# EAGLE board AudioMega v101 (EAGLE 6.1)
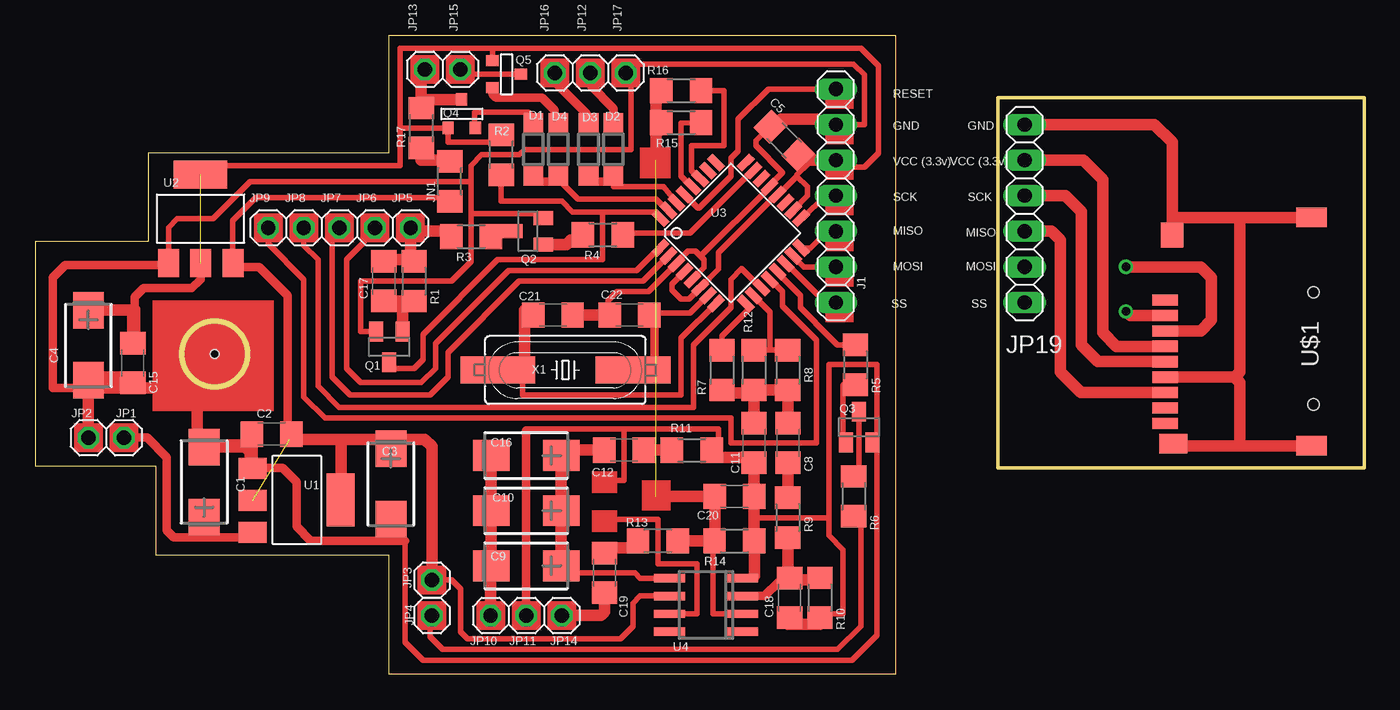
[diagram p0: board, top side]
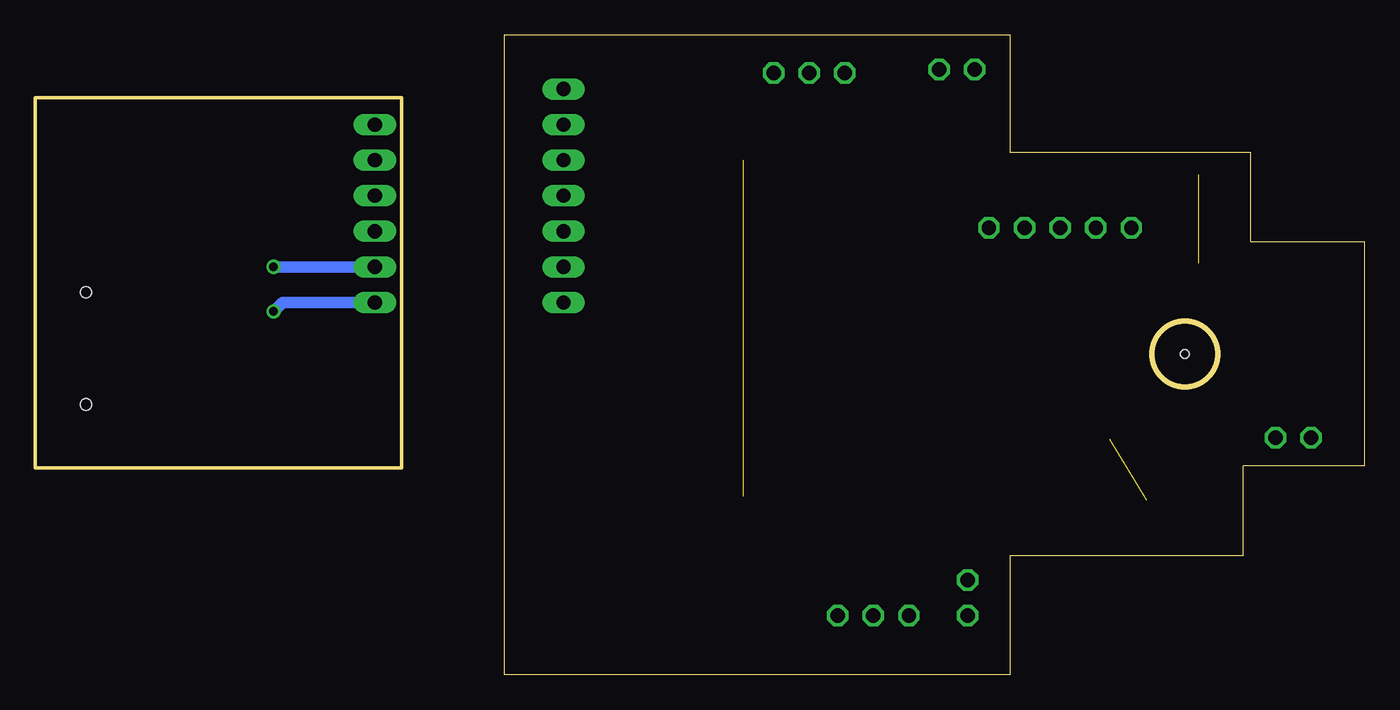
[diagram p1: board, bottom side, seen from below]

Size 94.87 x 45.65 mm. Coordinates in mm from the lower left corner, seen from the top.
Outline: 0,14.89 8.63,14.89 8.63,8.51 25.25,8.51 25.25,0 61.4,0 61.4,45.65 25.25,45.65 25.25,37.27 8.13,37.27 8.13,30.89 0,30.89 0,14.89
Outline: 94.87,14.75 94.87,41.17 68.71,41.17 68.71,14.75 94.87,14.75
Outline: circle at 12.83,22.88 radius 2.33
Copper layers (1*16): Top 0.035mm / dielectric 1.5mm / Bottom 0.035mm
Design rules: minimum track width 10mil, minimum drill 24mil, track to track 8mil, track to pad 8mil, pad to pad 8mil, via to via 8mil, smd to smd 8mil, copper to edge 40mil, drill to drill 8mil, minimum pad ring 10mil, minimum via ring 8mil, stop-mask expansion 4mil, vias tented up to drill 0mil, thermal gap 10mil
Net classes: 0 default: width 0.203 mm; 1 power: width 0.254 mm
Holes 0.6 mm at 12.83,22.88

## Footprints (pad centres in the part's own frame; a part is rotated, then mirrored left to right if it is on the bottom)
CT6032 = smd 2.6 x 2.2: + 2.5,0; - -2.5,0
C1206 = smd 1.6 x 1.8: 1 -1.4,0; 2 1.4,0
SOD123 = smd 1.4 x 1.4: A 1.9,0; C -1.9,0
1X07 = drill 1.016 long: 1 -7.62,0; 2 -5.08,0; 3 -2.54,0; 4 0,0; 5 2.54,0; 6 5.08,0; 7 7.62,0
R1206 = smd 1.6 x 1.803: 1 -1.422,0; 2 1.422,0
1X01 = drill 1.016 octagon: 1 0,0
1X06 = drill 1.016 long: 1 -6.35,0; 2 -3.81,0; 3 -1.27,0; 4 1.27,0; 5 3.81,0; 6 6.35,0
SOT23 = smd 1 x 1.4: 1 -0.95,-1.1; 2 0.95,-1.1; 3 0,1.1
SOT-23 = smd 0.787 x 0.889: 1 0.025,-1.016; 2 -0.94,1.016; 3 0.991,1.016
SOT223 = smd 1.499 x 2.007: 1 -2.261,-3.15; 2 0.025,-3.15; 3 2.311,-3.15 | smd 3.81 x 2.007: 4 0,3.15
TQFP32-08 = smd 1.27 x 0.559: 1 -4.293,2.8; 2 -4.293,2; 3 -4.293,1.2; 4 -4.293,0.4; 5 -4.293,-0.4; 6 -4.293,-1.2; 7 -4.293,-2; 8 -4.293,-2.8; 17 4.293,-2.8; 18 4.293,-2; 19 4.293,-1.2; 20 4.293,-0.4; 21 4.293,0.4; 22 4.293,1.2; 23 4.293,2; 24 4.293,2.8 | smd 0.559 x 1.27: 9 -2.8,-4.293; 10 -2,-4.293; 11 -1.2,-4.293; 12 -0.4,-4.293; 13 0.4,-4.293; 14 1.2,-4.293; 15 2,-4.293; 16 2.8,-4.293; 25 2.8,4.293; 26 2,4.293; 27 1.2,4.293; 28 0.4,4.293; 29 -0.4,4.293; 30 -1.2,4.293; 31 -2,4.293; 32 -2.8,4.293
SO08 = smd 0.6 x 2.2: 1 -1.905,-2.6; 2 -0.635,-2.6; 3 0.635,-2.6; 4 1.905,-2.6; 5 1.905,2.6; 6 0.635,2.6; 7 -0.635,2.6; 8 -1.905,2.6
MICROSD_PP = smd 1.8 x 0.8: 1 0,3.85; 2 0,2.75; 3 0,1.65; 4 0,0.55; 5 0,-0.55; 6 0,-1.65; 7 0,-2.75; 8 0,-3.85; 9 0,-4.95 | smd 1.6 x 1.8: GND@1 0.5,8.5 | smd 2.2 x 1.4: GND@2 10.45,9.75; GND@4 10.45,-6.55 | smd 2 x 1.4: GND@3 0.6,-6.4 | hole 0.8: 10.6,4.4; 10.6,-3.6
HC49UP = smd 5.334 x 1.93: 1 -4.826,0; 2 4.826,0

## Placement (x,y rotation side)
C1  10uF  [CT6032]  12.06,13.73 270 top
C2  100nF  [C1206]  16.89,17.16 180 top
C3  10uF  [CT6032]  25.4,13.61 90 top
C4  10uF  [CT6032]  3.81,23.51 90 top
C5  100nF  [C1206]  53.47,38.12 135 top
C8  100nF  [C1206]  53.72,16.53 90 top
C9  100uF  [CT6032]  35.05,7.76 0 top
C10  100uF  [CT6032]  35.05,11.7 0 top
C11  47nF  [C1206]  51.31,16.53 270 top
C12  47nF  [C1206]  42.04,16.02 180 top
C15  100nF  [C1206]  6.98,22.24 270 top
C16  47uF  [CT6032]  35.05,15.64 0 top
C17  10pF  [C1206]  24.89,28.09 90 top
C18  4n7  [C1206]  53.85,5.48 270 top
C19  100nF  [C1206]  40.64,7.26 90 top
C20  22nF  [C1206]  49.91,12.72 0 top
C21  22pF  [C1206]  36.96,25.67 180 top
C22  22pF  [C1206]  42.42,25.67 0 top
D1  BAT42  [SOD123]  35.56,37.48 90 top
D2  BAT42  [SOD123]  41.27,37.48 270 top
D3  BAT42  [SOD123]  39.5,37.48 270 top
D4  BAT42  [SOD123]  37.34,37.48 90 top
J1  [1X07]  57.15,34.18 90 top
JN1  0  [R1206]  29.59,35.2 270 top
JP1  +Ub  [1X01]  6.35,16.91 0 top
JP2  GND  [1X01]  3.81,16.91 0 top
JP3  BL+ (+5v)  [1X01]  28.32,6.75 0 top
JP4  BL-  [1X01]  28.32,4.21 0 top
JP5  PB7  [1X01]  26.8,31.89 0 top
JP6  D0  [1X01]  24.26,31.89 0 top
JP7  D1  [1X01]  21.72,31.89 0 top
JP8  D2  [1X01]  19.18,31.89 0 top
JP9  D3  [1X01]  16.64,31.89 0 top
JP10  SP+  [1X01]  32.51,4.21 0 top
JP11  SP-  [1X01]  35.05,4.21 0 top
JP12  PD2  [1X01]  39.62,42.94 0 top
JP13  RXD-TTL5v  [1X01]  27.81,43.2 0 top
JP14  BEEPER  [1X01]  37.59,4.21 0 top
JP15  PD3  [1X01]  30.35,43.2 0 top
JP16  TXD-TTL5v  [1X01]  37.08,42.94 0 top
JP17  GND  [1X01]  42.16,42.94 0 top
JP19  [1X06]  70.61,32.91 90 top
Q1  BC846ASMD  [SOT23]  25.27,23.39 180 top
Q2  BC846ASMD  [SOT23]  35.18,31.64 90 top
Q3  BC846ASMD  [SOT23]  58.8,17.67 0 top
Q4  2N7002  [SOT-23]  30.48,40.02 180 top
Q5  2N7002  [SOT-23]  33.66,42.82 90 top
R1  100k  [R1206]  27.05,28.09 90 top
R2  10k  [R1206]  33.27,37.1 270 top
R3  2k2  [R1206]  31.12,31.26 180 top
R4  10k  [R1206]  40.51,31.39 180 top
R5  10k  [R1206]  58.55,22.12 90 top
R6  150  [R1206]  58.42,12.72 90 top
R7  1k  [R1206]  49.02,21.73 90 top
R8  560k  [R1206]  53.72,21.73 90 top
R9  33k  [R1206]  53.72,11.19 90 top
R10  4k7  [R1206]  56.01,5.48 90 top
R11  10  [R1206]  46.86,16.02 180 top
R12  470k  [R1206]  51.31,21.73 90 top
R13  100k  [R1206]  44.45,9.54 0 top
R14  1k  [R1206]  49.91,9.54 180 top
R15  2k2  [R1206]  46.1,39.39 180 top
R16  1k  [R1206]  46.1,41.67 180 top
R17  1k  [R1206]  27.56,39.01 90 top
U1  REG1117-5  [SOT223]  18.67,12.46 270 top
U2  REG1117-3.3  [SOT223]  11.81,32.53 0 top
U3  ATMEGA328-AU  [TQFP32-08]  49.66,31.51 45 top
U4  LM386M  [SO08]  47.88,4.97 90 top
U$1  MICROSD_PP  [MICROSD_PP]  80.65,22.88 0 top
X1  12MHz  [HC49UP]  37.85,21.73 0 top

## Library data of the parts
C1-C5 C8-C12 C15-C22 JN1 R1-R17 = resistor
D1-D4 = diode
J1 JP1-JP17 JP19 = pinhead
Q1-Q3 = transistor-npn
Q4 Q5 = zetex; OC_FARNELL: unknown; OC_NEWARK: unknown
U1 U2 = burr-brown; MPN: REG1117; OC_FARNELL: 1097566; OC_NEWARK: 14P6981
U3 = atmel; MPN: ATMEGA8-16AU; OC_FARNELL: 9171371; OC_NEWARK: 73M8863
U4 = linear
U$1 = DE1594-v2
X1 = crystal; OC_FARNELL: unknown; OC_NEWARK: unknown

## Nets
+3V3: C4.+ C5.1 C15.1 J1.5 Q4.3 Q5.3 R2.1 U2.2 U2.4 U3.4 U3.6 U3.18 U3.20
+5V: C2.1 C3.+ JN1.2 JP3.1 U1.2 U1.4 U2.3 U4.6
B7: C17.2 JP5.1 R1.2 R3.2
CLK: Q1.3 R2.2 U3.32
GND: C1.- C2.2 C3.- C5.2 C11.2 C15.2 C18.2 C20.2 C21.1 C22.1 J1.6 JP2.1 JP11.1 JP17.1 Q1.2 Q2.2 Q3.2 R10.1 R11.1 R14.1 U1.1 U2.1 U3.3 U3.5 U3.21 U4.4
N$1: R4.1 U3.23
N$2: D4.A Q5.2
N$3: J1.2 U3.15
N$4: J1.3 U3.16
N$5: J1.4 U3.17
N$6: J1.7 U3.29
N$7: C22.2 U3.7 X1.2
N$8: C21.2 U3.8 X1.1
N$9: Q2.1 R4.2
N$10: R16.1 U3.27
N$11: R15.1 U3.28
N$12: Q2.3 R3.1
N$13: C17.1 Q1.1 R1.1
N$14: U4.7
N$15: C9.- C10.- C16.- JP10.1
N$16: C12.1 R11.2
N$17: C9.+ C10.+ C12.2 C16.+ U4.5
N$18: C18.1 R9.1 R10.2 U4.3
N$19: C19.1 JP14.1
N$20: C19.2 R13.1
N$21: J1.1 U3.14
N$22: JN1.1 R17.1
N$23: JP19.6 U$1.6 U$1.GND@1 U$1.GND@2 U$1.GND@3 U$1.GND@4
N$24: C8.1 R9.2
N$25: C8.2 C11.1 R7.1 R8.1 R12.1
N$26: Q3.3 R6.2
N$27: R7.2 U3.9
N$28: R8.2 R12.2 U3.10
N$29: JP4.1 R6.1
N$30: JP9.1 U3.12
N$31: JP8.1 U3.11
N$32: C1.+ JP1.1 U1.3
N$33: Q3.1 R5.1
N$34: R5.2 U3.13
N$35: JP7.1 U3.2
N$36: JP6.1 U3.1
N$37: D3.C JP16.1
N$38: JP15.1 Q5.1
N$39: D2.C JP12.1
N$40: JP19.1 U$1.2
N$41: JP13.1 Q4.1 R17.2
N$42: D2.A D3.A U3.30
N$43: JP19.2 U$1.3
N$44: JP19.3 U$1.7
N$45: D1.A Q4.2
N$46: D1.C D4.C U3.31
N$47: JP19.4 U$1.5
N$48: JP19.5 U$1.4
VOL_B: C20.1 R13.2 R14.2 R15.2 R16.2 U4.2

## Tracks (layer width: path | path; a pad name or v marks a point on that pad's centre or on a via)
+3V3  (1 unrouted)
  Top 0.254: R2.1 33.27,37.99
  Top 0.406: U2.4 12.57,36.34 26.04,36.34 26.04,39.01 | J1.5 57.4,36.21 59.18,36.21 60.2,37.23 60.2,43.45 58.93,44.72 32.64,44.72 | 26.04,39.01 26.04,44.72 32.64,44.72 | 26.04,39.01 Q4.3 29.46,38.88 29.46,37.99 33.27,37.99 33.66,37.99 | Q5.3 32.64,44.72 | 55.21,36.5 54.38,35.68 54.38,35.55 | 55.21,36.5 55.43,36.72 | C5.1 55.05,36.64 55.21,36.5 | 55.21,36.5 | 54.38,35.55 55.12,34.82 55.12,34.18 54.11,33.17 U3.18 | U3.4 45.47,27.89 45.47,27.45 46.1,26.82 46.66,26.82 U3.6 48.77,28.93 48.77,30.12 52.92,34.27 U3.20 53.04,34.27 54.36,35.58 54.38,35.55
  Top 0.61: J1.5 57.31,36.34 | U2.2 11.81,29.38 11.81,28.21 11.18,27.58 7.75,27.58 7.11,26.94 7.11,26.05
  Top 0.813: 7.11,26.01 7.11,23.77 | J1.5 54.99,36.72 54.99,36.69 55.05,36.64 | C4.+ 7.11,26.01 | 7.11,26.01 7.11,26.05 6.98,26.05 C15.1
+5V  (1 unrouted)
  Top 0.406: JN1.2 29.21,33.55 29.21,34.05 15.75,34.05 14.1,32.4 14.1,30.12 U2.3 | JP3.1 29.72,6.75 30.35,6.11 30.35,3.07 30.86,2.56 41.78,2.56 42.67,3.45 42.67,5.1 43.18,5.61 U4.6
  Top 0.61: C2.1 18.29,17.29 18.03,17.42 18.03,27.07 16,29.1 14.22,29.1 14.1,28.72 14.1,29.36 U2.3
  Top 0.813: U1.4 21.82,13.23 | 21.82,13.23 21.82,13.45 21.84,14.37 | 21.84,16.78 21.84,14.37 | 21.84,14.37 21.84,14.01 21.82,13.23 | 21.84,16.78 24.73,16.78 C3.+ 26.08,16.78 27.81,16.78 28.32,16.27 JP3.1 | 21.84,16.78 18.16,16.78 18.16,16.91 18.29,17.04 C2.1
B7
  Top 0.254: 26.8,29.48 27.05,29.48
  Top 0.406: 29.21,31.64 R3.2 29.21,31.89 | 27.05,29.48 R1.2 | 24.89,29.51 C17.2
  Top 0.813: 26.8,29.61 JP5.1 27.05,31.64 29.21,31.64 | 26.8,29.48 26.8,29.61 | 26.8,29.61 25.15,29.61 25.02,29.48 C17.2
CLK
  Top 0.406: 40.51,33.01 38.35,33.01 37.59,33.8 33.27,33.8 R2.2 | 40.51,33.01 44.2,33.01 U3.32 | 40.51,33.01 40.51,29.61 33.02,29.61 27.69,24.28 27.69,22.5 27.05,21.86 25.27,21.86 Q1.3
GND
  Top 0.406: J1.6 59.18,39.26 59.18,42.82 58.42,43.58 42.67,43.58 42.93,42.94 | U2.1 9.53,28.59 9.53,28.85 | 13.87,19.93 13.84,19.96 | 13.84,19.96 14.86,19.96 15.62,20.72 | 42.67,42.82 42.93,42.94 | 9.53,28.85 9.53,31.89 10.16,32.53 12.7,32.53 15.37,35.2 31.12,35.2 | 42.04,17.54 35.31,17.54 35.18,17.54 | 42.04,17.54 48.77,17.54 48.77,15.64 48.67,15.64 R11.1 | 56.64,11.19 51.31,11.19 51.31,9.54 R14.1 | 56.01,4.08 56.01,4.34 | 56.01,4.34 56.01,4.44 | 56.01,3.96 55.88,3.83 | 53.85,3.83 C18.2 | 40.89,26.43 C22.1 41.02,26.18 40.89,26.31 40.89,26.69 41.53,27.32 43.77,27.32 U3.3 45.77,29.41 46.61,30.24 47.12,30.24 47.5,29.86 | 47.5,29.86 47.75,29.61 47.75,29.04 U3.5 | 47.5,29.86 52.41,34.77 U3.21 52.41,34.9 53.34,35.83 51.43,37.74 51.43,38.12 52.42,39.11 C5.2 52.48,39.23 52.45,39.26 | 56.64,11.19 56.64,22.12 60.07,22.12 60.07,17.02 | 60.07,17.02 Q3.2 | 51.31,15.51 C11.2 | 40.64,13.86 42.04,13.86 42.04,17.54 | Q1.2 23.24,24.49 23.24,28.09 29.72,28.09 31.12,29.48 31.12,32.91 | JP17.1 42.67,42.94 | 31.12,32.91 35.56,32.91 Q2.2 | U4.4 51.31,6.88 | JP2.1 3.81,17.67 3.05,17.67 | 3.68,21.23 3.75,21.29 3.81,21.35 3.94,21.23 | C15.2 6.98,20.72 | 15.11,14.75 U1.1 | 12.06,21.73 13.84,19.96 | 26.42,9.54 26.42,2.3 27.69,1.03 58.29,1.03 60.07,2.81 60.07,17.02 | 25.02,9.54 26.42,9.54 | 26.42,9.54 25.91,9.67 | 25.53,9.67 25.27,9.67 | 24.89,9.67 25.27,9.67 | 25.27,9.67 25.02,10.18 25.02,10.84 | 56.64,11.19 56.64,9.92 57.66,8.91 57.66,4.34 56.01,4.34 | 51.31,7 51.31,6.88 | 51.31,6.88 51.43,6.88 | 9.53,28.85 9.4,28.97 | 42.67,42.94 42.54,42.82 42.54,37.48 34.92,37.48 34.54,37.1 31.88,37.1 31.12,36.34 31.12,35.2 | 42.67,42.94 42.93,42.94
  Top 0.406: 31.12,32.91 31.12,35.2 | 35.05,17.42 35.18,17.54 | 35.05,17.54 35.18,17.54
  Top 0.61: J1.6 57.09,39.26 | 9.4,29.23 2.16,29.23 1.27,28.34 1.27,20.46 3.81,20.46 | 26.42,9.54 19.69,9.54 18.67,10.56 18.67,13.73 17.65,14.75 15.49,14.75 | 15.37,14.75 15.49,14.75 | 15.49,14.75 U1.1 | JP11.1 35.05,17.42
  Top 0.813: C1.- 11.56,16.78 | 11.56,16.78 11.68,16.78 | 11.56,19.66 11.87,19.69 | 11.87,19.69 13.87,19.93 | C1.- 11.56,16.66 11.68,16.78 | 3.81,21.35 3.81,21.48 3.94,21.61 3.81,21.61 | 3.81,21.76 3.81,21.23 | 3.81,21.23 3.75,21.29 | C1.- 15.41,16.23 15.49,14.75 15.11,14.75 15.11,14.62 14.99,14.5 14.99,14.62 | C2.2 15.49,15.13 15.37,15 15.37,15.89 14.86,16.4 12.06,16.4 11.68,16.78 | C11.2 C20.2 | 53.85,3.83 53.72,3.7 53.72,3.57 56.01,3.57 56.01,3.96 R10.1 56.01,4.08 55.5,4.34 56.01,4.34 | 51.31,12.59 C20.2 | C20.2 51.31,9.57 R14.1 51.33,7.03 51.31,7 | 11.56,16.78 11.56,19.66 | 11.56,19.66 11.56,19.7 | 6.98,20.72 6.98,20.46 | 6.98,20.46 3.81,20.46 | 3.81,20.46 3.68,20.72 | 3.68,20.72 3.81,21.23 | 3.81,21.23 6.22,21.23 6.98,20.46 | 6.98,20.46 11.1,20.46 11.87,19.69 | 9.4,28.97 9.4,29.23 | 3.68,21.23 3.68,20.72 | 3.68,20.72 3.68,20.59 3.81,20.46 | 3.81,17.67 3.81,20.46 | 52.32,39.13 52.45,39.13 C5.2 52.68,39.11 53.21,39.64 55.75,39.64 56.13,39.26 57.09,39.26 | C21.1 40.89,25.67 41.02,25.55 C22.1 | 48.77,15.64 48.77,15.51 51.31,15.51 | C3.- 25.4,9.8 25.53,9.67 25.91,9.67
N$1
  Top 0.406: U3.23 51.19,35.96 46.74,31.51 41.93,31.51 R4.1
N$2
  Top 0.61: Q5.2 32.64,41.42 32.89,41.17 36.2,41.17 37.08,40.28 37.08,39.52 37.21,39.39 D4.A
N$3
  Top 0.406: U3.15 54.11,29.86 54.86,29.1 J1.2
N$4
  Top 0.406: U3.16 55.33,30.46 56.52,31.64 J1.3
N$5
  Top 0.406: U3.17 54.78,32.57 56.39,34.18 J1.4
N$6
  Top 0.406: 56.64,41.42 J1.7 52.32,41.8 50.16,39.64 50.16,37.36 49.66,36.85 49.66,35.58 47.37,33.29 47.31,33.29 U3.29
N$7
  Top 0.406: U3.7 48,27.06 46.74,25.8 44.2,25.8 43.44,25.8 C22.2 | 44.45,21.86 44.07,21.73 X1.2 44.58,21.87
  Top 0.61: 44.58,21.87 44.2,22.25 44.2,25.8 44.07,25.93 C22.2 43.81,25.93 43.69,25.93
N$8
  Top 0.406: U3.8 48.58,26.5 46.1,24.02 46.1,19.96 34.8,19.96 34.8,21.73 34.74,21.73 34.74,21.78 | 34.74,21.78 X1.1 | C21.2 35.05,26.03 34.92,26.03 35.05,26.05 | 34.74,21.78 34.92,21.78
  Top 0.813: 34.92,26.03 34.92,21.78 34.92,21.73
N$9
  Top 0.406: 39.16,30.69 39.14,30.88 R4.2
  Top 0.813: Q2.1 37.91,30.69 38.23,31.01 38.86,31.01 38.99,30.88 39.14,30.88
N$10
  Top 0.406: U3.27 47.42,35.4 46.86,35.96 46.86,37.74 49.15,37.74 49.15,41.67 R16.1
N$11
  Top 0.406: U3.28 46.85,34.83 46.1,35.58 46.1,39.36 R15.1
N$12
  Top 0.406: 32.77,31.64 32.28,31.56 R3.1
  Top 0.813: 32.77,31.64 Q2.3 34.16,31.64
N$13
  Top 0.813: Q1.1 26.22,26.62 26.29,26.69 27.05,26.69 R1.1 24.91,26.66 C17.1
N$14
  Top 0.406: U4.7 47.24,4.34 47.24,7.89 44.45,7.89 44.45,11.07 40.64,11.07
N$15
  Top 0.813: JP10.1 32.51,7.76 C9.- C10.- | C10.- 32.55,11.79 32.51,11.83 32.51,11.74 C10.- | C16.- C10.-
N$16
  Top 0.813: C12.1 R11.2 45.47,16.02
N$17
  Top 0.406: C9.+ 37.55,7.26 42.8,7.26 43.18,6.88 U4.5 | 37.55,16.02 C16.+
  Top 0.813: C16.+ C10.+ | C10.+ 37.55,11.66 | 37.55,11.66 37.46,11.57 | 37.55,11.66 37.59,11.7 | C10.+ C9.+ | 37.55,16.02 C12.2
N$18
  Top 0.406: 55.37,6.88 R10.2 | C18.1 53.34,7.13 53.72,7.26
  Top 0.61: U4.3 52.07,5.61 53.09,6.62 53.59,6.62 53.72,6.75 53.59,6.88 53.72,6.88 55.98,6.88 R10.2
  Top 0.813: 53.85,7.13 53.72,6.88 | 53.72,6.88 C18.1 | R9.1 53.72,7.26 53.72,6.88 | 55.37,6.88 55.24,6.75 53.72,6.75 53.59,6.75 53.72,6.88
N$19
  Top 0.406: C19.1 40.64,5.99
  Top 0.813: JP14.1 40.39,4.21 40.64,4.46 40.64,5.73 C19.1
N$20
  Top 0.406: R13.1 42.67,9.54 42.67,9.04 | 40.64,8.91 C19.2
  Top 0.813: 40.64,8.91 40.77,8.91 40.89,9.04 42.67,9.04 42.8,9.04
N$21
  Top 0.305: U3.14 53.62,29.33 53.91,29.04
  Top 0.406: 53.59,29.36 53.91,29.04 56.77,26.18 J1.1
N$22
  Top 0.406: R17.1 27.56,37.1 | 29.08,36.59 JN1.1
  Top 0.813: 27.56,37.1 27.56,36.72 29.46,36.72 29.08,36.59
N$23  (via drill 0.6)
  Top 0.813: 81.15,32.66 U$1.GND@1 81.15,32.01 81.66,32.53 | 81.15,32.66 81.15,38 79.88,39.26 JP19.6 | U$1.GND@2 85.88,32.63 | 85.88,32.63 81.17,32.63 81.15,32.66 | U$1.GND@4 85.98,16.33 | 85.98,16.33 81.4,16.33 U$1.GND@3 | 85.6,21.23 85.98,20.85 85.98,16.33 | 85.88,32.63 85.98,32.53 85.85,32.53 85.98,32.4 85.98,21.61 85.6,21.23 | U$1.6 85.6,21.23
  other vias: 70.61,39.26
N$24
  Top 0.813: C8.1 R9.2
N$25
  Top 0.254: 51.31,20.08 R12.1
  Top 0.813: R7.1 49.05,20.31 49.28,20.08 51.31,20.08 51.31,18.05 C11.1 | R12.1 R8.1 C8.2
N$26
  Top 0.406: Q3.3 58.8,14.24 58.7,14.14 R6.2
N$27
  Top 0.406: U3.9 50.67,26.43 51.05,26.18 49.02,24.15 R7.2
N$28
  Top 0.406: 53.72,23.01 R8.2 52.45,23.16 | 52.45,23.16 R12.2 | U3.10 52.45,25.89 52.45,23.16
N$29
  Top 0.406: R6.1 58.9,11.17 58.95,11.17 58.67,10.89 58.37,10.89 58.29,10.81 58.17,10.81 58.93,11.32 58.93,3.45 57.28,1.8 29.08,1.8 28.19,2.69 28.19,3.45 28.96,3.83 28.58,4.21 JP4.1
N$30
  Top 0.406: U3.12 52.47,28.2 53.34,27.32 53.34,26.31 55.75,23.89 55.75,16.53 49.66,16.53 49.66,18.31 20.7,18.31 19.18,19.83 19.18,28.21 16.64,30.75 JP9.1
N$31
  Top 0.406: U3.11 51.76,27.63 50.42,28.97 49.66,28.21 49.66,26.18 46.99,23.51 46.99,19.07 21.72,19.07 20.19,20.59 20.19,29.61 19.18,30.62 JP8.1
N$32
  Top 0.61: JP1.1 8,16.91 9.4,15.51 9.4,10.3 9.91,9.8 11.81,9.8 | 11.81,9.8 15.49,9.8 U1.3 | 11.81,10.71 11.81,9.8
  Top 0.813: 11.81,10.71 11.7,10.71 C1.+
N$33
  Top 0.406: R5.1 57.68,20.69 57.66,20.59 57.66,17.02 Q3.1
N$34
  Top 0.406: U3.13 52.98,28.7 54.61,27.07 54.61,26.18 56.77,24.02 57.28,23.54 R5.2
N$35
  Top 0.406: JP7.1 21.72,31.51 21.21,31.01 21.21,21.23 22.48,19.96 28.19,19.96 29.46,21.23 29.46,23.01 34.54,28.09 43.4,28.09 U3.2
N$36
  Top 0.406: U3.1 44.54,30.46 42.93,28.85 33.78,28.85 28.58,23.64 28.58,21.86 27.56,20.85 23.24,20.85 22.23,21.86 22.23,29.61 23.5,30.88 24.26,31.77 JP6.1
N$37
  Top 0.61: D3.C 39.37,40.02 36.96,42.44 JP16.1
N$38
  Top 0.406: JP15.1 30.35,42.94 30.48,42.94 30.48,42.84 Q5.1
N$39
  Top 0.61: D2.C 41.27,40.4 39.62,42.05 JP12.1
N$40  (via drill 0.6)
  Top 0.813: U$1.2 78.15,25.63 v77.85,25.93
  Bottom 0.813: v77.85,25.93 77.22,26.56 JP19.1
N$41
  Top 0.406: R17.2 27.56,41.04 | 27.69,43.2 JP13.1
  Top 0.813: 27.69,43.2 27.56,43.07 27.56,41.04 Q4.1 | 27.69,43.07 27.69,43.2 | 27.69,43.2 27.56,43.2
N$42
  Top 0.406: U3.30 44.83,34.82 41.27,34.82 D2.A
  Top 0.61: D3.A 39.88,35.2 40.89,35.2 D2.A
N$43  (via drill 0.6)
  Top 0.813: U$1.3 83.18,24.53 83.95,25.29 83.95,28.34 83.19,29.1 v77.85,29.1
  Bottom 0.813: v77.85,29.1 JP19.2
N$44
  Top 0.813: U$1.7 74.63,20.13 73.15,21.61 73.15,31.01 72.52,31.64 JP19.3
N$45
  Top 0.406: Q4.2 31.37,39.01 31.37,40.15 35.18,40.15 35.56,39.77 D1.A
N$46
  Top 0.406: U3.31 45.11,33.13 44.32,33.93 38.73,33.93 37.59,35.07 D4.C
  Top 0.61: D1.C 35.56,35.32 35.69,35.2 36.95,35.2 D4.C
N$47
  Top 0.813: U$1.5 75.86,22.33 74.68,23.51 74.68,33.04 73.53,34.18 JP19.4
N$48
  Top 0.813: U$1.4 77.17,23.43 76.2,24.4 76.2,35.32 74.8,36.72 JP19.5
VOL_B  (1 unrouted)
  Top 0.406: U4.2 48.39,4.34 48.39,9.42 48.49,9.42 R14.2 48.51,9.54 | R13.2 45.85,9.54
  Top 0.813: 44.32,12.72 48.39,12.72 48.51,12.84 C20.1 48.51,9.55 48.51,9.54 | 48.51,9.54 R14.2 48.26,9.54 | R13.2 48.26,9.54 | 48.51,9.54 48.51,9.67 48.39,9.67 48.26,9.54 | R16.2 44.58,41.67 44.32,41.42 44.32,39.39 44.58,39.13 44.7,39.26 44.7,39.36 R15.2 44.68,38.98 44.32,38.63 44.32,36.72
(copper drawn outside any net)
  shapes: Top area x29, Top circle x2

## Text on the board
bPlace: 5V | 3.3V
tNames: RESET | GND | GND | VCC (3.3v) | VCC (3.3v) | SCK | SCK | MISO | MISO | MOSI | MOSI | SS | SS